# Altium PCB barricelli.PcbDoc (part 3 of 5)
Units mm, origin at the board's own origin, x right, y up, seen from the top; angles counter-clockwise.
Board outline 153 x 153 mm, 8 copper layers (Top Layer, PWR, Mid-Layer 1, Mid-Layer 2, Mid-Layer 3, Mid-Layer 4, GND, Bottom Layer); 168 components, 427 nets, 1233 pads, 911 vias.
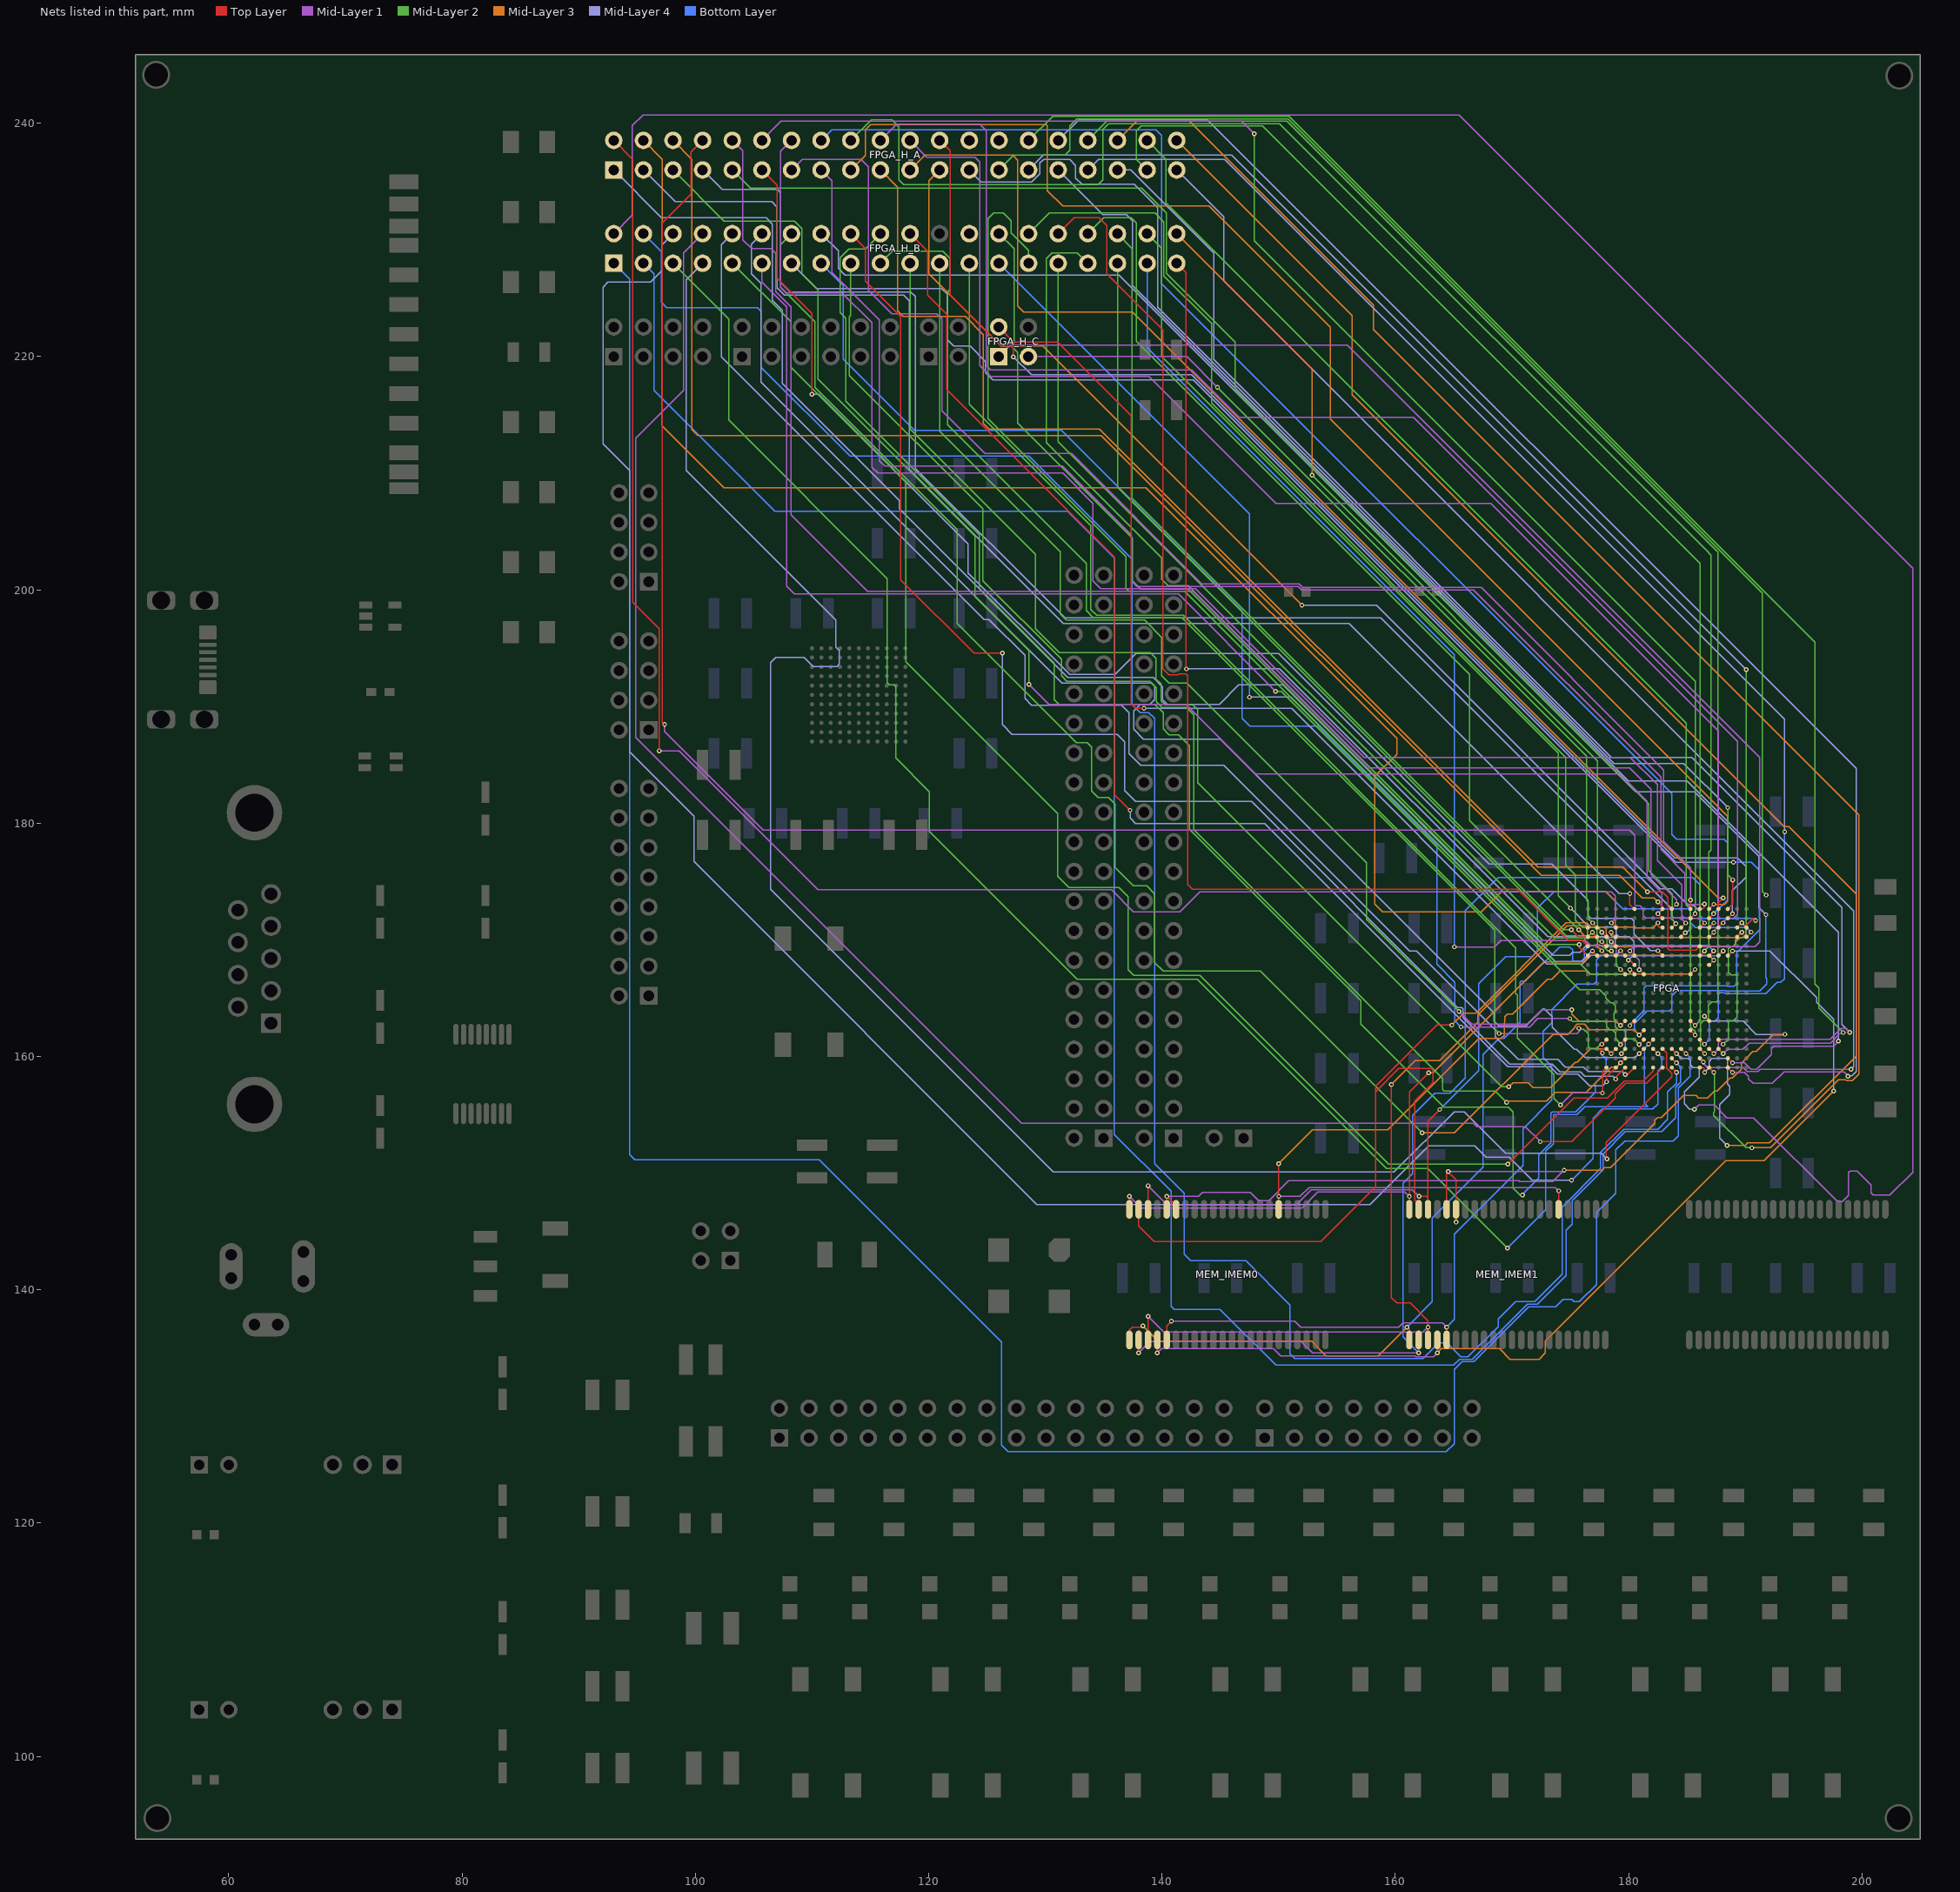
[diagram p9: the nets of this part, all layers, seen from the top]

## Via types
v1: diameter 0.4, hole 0.2, Top Layer to Bottom Layer, tented top, 896 vias
v2: diameter 0.4, hole 0.2, Top Layer to Bottom Layer, 14 vias
v3: diameter 0.6, hole 0.2, Top Layer to Bottom Layer, tented top, 1 vias

## Nets (pads, with @x,y where several pads share a name; then routed paths per layer and width w, separated by ;. In a path a pad name is that pad's centre, name@x,y a point inside that pad or via, vN(x,y) a via of type N, cw(c..) or ccw(c..) an arc to the next point about the centre after c; other vN are vias at no path point) (continued)
FPGA_HEADER0: FPGA.D4 FPGA_H_A.1 | length 126
  Top Layer w0.1: v1(178.5,170.65) 178.498,170.65 178.562,170.586 178.564,170.586 FPGA.D4@178.9,170.25
  Mid-Layer 4 w0.1: FPGA_H_A.1@93,236 97.098,231.902 106.07,231.902 106.604,231.369 106.604,224.815 107.442,223.977 107.442,217.703 117.475,207.67 117.475,206.959 131.928,192.507 139.243,192.507 140.056,191.694 140.056,190.602 140.462,190.195 144.907,190.195 146.578,191.866 150.348,191.866 173.533,168.681 174.955,168.681 175.209,168.935 175.819,168.935 176.433,169.55 176.705,169.55 176.755,169.5 177.045,169.5 177.095,169.55 177.505,169.55 177.555,169.5 177.845,169.5 177.895,169.55 178.305,169.55 178.366,169.489 178.684,169.489 178.867,169.672 178.867,170.053 178.486,170.434 178.486,170.663 178.498,170.65 v1(178.5,170.65)
FPGA_HEADER1: FPGA.C4 FPGA_H_A.2 | length 145.6
  Top Layer w0.1: FPGA_H_A.2@93,238.54 94.615,236.925 94.615,198.958 96.901,196.672 v1(96.901,186.207) ; v1(178.511,171.45) 178.714,171.247 178.9,171.247 FPGA.C4@178.9,171.05
  Mid-Layer 1 w0.1: v1(96.901,186.207) 98.603,186.207 110.515,174.295 135.661,174.295 137.541,172.415 141.529,172.415 143.233,174.119 178.509,174.119 178.867,173.761 178.867,171.806 v1(178.511,171.45)
FPGA_HEADER2: FPGA.A6 FPGA_H_A.3 | length 124.3
  Top Layer w0.1: v1(180.1,173.962) 180.1,173.05 FPGA.A6@180.5,172.65
  Mid-Layer 4 w0.1: FPGA_H_A.3@95.54,236 98.266,233.274 106.553,233.274 107.006,232.82 107.006,225.912 107.645,225.273 117.856,225.273 118.339,224.79 118.339,210.312 131.547,197.104 156.046,197.104 179.188,173.962 v1(180.1,173.962)
FPGA_HEADER3: FPGA.C9 FPGA_H_A.4 | length 142.9
  Top Layer w0.1: v1(182.499,171.45) 182.499,171.196 182.645,171.05 FPGA.C9@182.9,171.05
  Mid-Layer 3 w0.1: FPGA_H_A.4@95.54,238.54 97.155,236.925 97.155,214.046 102.438,208.763 138.633,208.763 160.122,187.274 160.122,185.903 158.242,184.023 158.242,173.076 158.902,172.415 167.361,172.415 169.113,174.168 178.042,174.168 178.861,173.348 178.861,171.298 179.064,171.094 180.518,171.094 180.594,171.018 182.067,171.018 v1(182.499,171.45)
FPGA_HEADER4: FPGA.B9 FPGA_H_A.5 | length 128.3
  Top Layer w0.1: v1(182.499,172.237) 182.513,172.237 FPGA.B9@182.9,171.85
  Mid-Layer 1 w0.1: v1(128.6,191.897) 130.302,190.195 142.062,190.195 148.031,184.226 179.211,184.226 181.585,181.852 181.585,175.294 182.855,174.024 182.855,172.593 v1(182.499,172.237)
  Mid-Layer 2 w0.1: FPGA_H_A.5@98.08,236 102.457,231.623 108.509,231.623 109.144,230.988 109.144,227.101 110.515,225.73 110.515,218.059 123.977,204.597 123.977,199.415 128.6,194.793 v1(128.6,191.897)
FPGA_HEADER5: FPGA.A9 FPGA_H_A.6 | length 125.8
  Top Layer w0.1: v1(182.499,173.253) 182.9,172.852 FPGA.A9@182.9,172.65
  Mid-Layer 3 w0.1: FPGA_H_A.6@98.08,238.54 99.695,236.925 99.695,213.766 100.228,213.233 134.798,213.233 172.517,175.514 179.222,175.514 181.153,173.584 182.169,173.584 v1(182.499,173.253)
FPGA_HEADER6: FPGA.D11 FPGA_H_A.7 | length 126.8
  Top Layer w0.1: FPGA.D11@184.5,170.25 184.811,170.561 184.912,170.561 184.873,170.6 v1(184.85,170.6)
  Mid-Layer 4 w0.1: FPGA_H_A.7@100.62,236 102.305,234.315 107.036,234.315 107.315,234.036 107.315,226.356 108.119,225.552 118.466,225.552 118.872,225.146 118.872,210.414 131.674,197.612 158.75,197.612 183.667,172.695 183.667,172.11 183.896,171.882 185.115,171.882 185.268,171.729 185.268,170.917 184.912,170.561 184.873,170.6 v1(184.85,170.6)
FPGA_HEADER7: FPGA.C11 FPGA_H_A.8 | length 151
  Top Layer w0.1: v1(97.358,188.468) 97.155,188.671 97.155,231.445 99.619,233.909 99.619,237.539 FPGA_H_A.8@100.62,238.54 ; FPGA.C11@184.5,171.05 184.875,171.425 184.912,171.425 184.9,171.437 v1(184.9,171.45)
  Mid-Layer 1 w0.1: v1(97.358,188.468) 97.358,187.858 105.791,179.426 180.086,179.426 180.543,178.968 180.543,173.005 180.645,172.903 180.965,172.903 181.25,172.618 181.25,172.095 181.458,171.887 184.449,171.887 184.9,171.437 v1(184.9,171.45)
FPGA_HEADER8: FPGA.C10 FPGA_H_A.9 | length 118.3
  Top Layer w0.1: FPGA.C10@183.7,171.05 184.024,171.374 184.024,171.449 184.05,171.423 v1(184.05,171.4)
  Mid-Layer 2 w0.1: FPGA_H_A.9@103.16,236 104.718,234.442 138.252,234.442 140.36,232.334 140.36,227.153 146.253,221.259 146.253,217.119 181.712,181.661 181.712,175.946 183.744,173.914 183.744,171.729 184.05,171.423 v1(184.05,171.4)
FPGA_HEADER9: FPGA.A10 FPGA_H_A.10 | length 130
  Top Layer w0.1: FPGA.A10@183.7,172.65 v1(184.099,173.049)
  Mid-Layer 1 w0.1: FPGA_H_A.10@103.16,238.54 104.064,237.636 104.064,230.022 104.826,229.26 106.477,229.26 106.883,228.854 106.883,225.577 108.179,224.282 108.179,206.451 114.757,199.873 142.697,199.873 157.81,184.76 180.086,184.76 181.915,182.931 181.915,175.616 184.099,173.431 v1(184.099,173.049)
FPGA_HEADER10: FPGA.F9 FPGA_H_A.11 | length 118.3
  Top Layer w0.1: FPGA_H_A.11@105.7,236 106.985,234.715 106.985,226.72 109.982,223.723 v1(109.982,216.764) ; v1(182.499,169.062) 182.499,169.051 FPGA.F9@182.9,168.65
  Mid-Layer 4 w0.1: v1(109.982,216.764) 110.566,216.764 123.368,203.962 123.368,201.452 132.08,192.74 135.97,192.74 137.77,194.54 150.011,194.54 168.046,176.505 173.411,176.505 176.505,173.411 176.505,172.11 176.759,171.856 180.238,171.856 180.467,171.628 180.467,170.485 181.889,169.062 v1(182.499,169.062)
FPGA_HEADER11: FPGA.B12 FPGA_H_A.12 | length 126.4
  Top Layer w0.1: FPGA.B12@185.3,171.85 185.687,172.237 v1(185.699,172.237)
  Mid-Layer 1 w0.1: FPGA_H_A.12@105.7,238.54 107.342,240.182 146.837,240.182 v1(147.904,239.116)
  Mid-Layer 2 w0.1: v1(147.904,239.116) 147.904,229.946 185.699,192.151 v1(185.699,172.237)
FPGA_HEADER12: FPGA.A12 FPGA_H_A.13 | length 120.5
  Top Layer w0.1: FPGA.A12@185.3,172.65 v1(185.3,173.399)
  Mid-Layer 1 w0.1: FPGA_H_A.13@108.24,236 109.146,236.906 114.198,236.906 114.833,236.271 114.833,225.676 116.837,223.672 120.701,223.672 121.133,223.241 121.133,215.367 124.816,211.684 132.232,211.684 143.391,200.525 151.734,200.525 152.059,200.2 167.363,200.2 183.007,184.556 183.007,178.457 185.3,176.164 v1(185.3,173.399)
FPGA_HEADER13: FPGA.C13 FPGA_H_A.14 | length 131.8
  Top Layer w0.1: FPGA.C13@186.1,171.05 186.5,171.45 v1(186.512,171.45)
  Mid-Layer 1 w0.1: FPGA_H_A.14@108.24,238.54 107.315,237.615 107.315,225.958 107.798,225.476 112.573,225.476 115.138,222.91 115.138,210.515 115.646,210.007 131.496,210.007 134.087,207.416 134.087,200.758 134.744,200.101 142.877,200.101 157.33,185.649 180.137,185.649 182.474,183.312 182.474,176.809 184.556,174.727 184.556,172.401 184.55,172.395 184.55,172.105 184.799,171.856 186.106,171.856 v1(186.512,171.45)
FPGA_HEADER14: FPGA.A13 FPGA_H_A.15 | length 121.6
  Top Layer w0.1: FPGA.A13@186.1,172.65 186.341,172.65 186.512,172.822 186.512,173.063 v1(186.5,173.075)
  Mid-Layer 1 w0.1: FPGA_H_A.15@110.78,236 111.684,235.096 111.684,227.228 115.773,223.139 115.773,211.074 116.23,210.617 131.445,210.617 137.389,204.673 137.389,200.762 137.846,200.304 151.672,200.304 151.976,200 166.7,200 182.753,183.947 182.753,177.775 184.836,175.692 184.836,173.304 185.115,173.025 186.512,173.025 186.5,173.037 v1(186.5,173.075)
FPGA_HEADER15: FPGA.B14 FPGA_H_A.16 | length 120
  Top Layer w0.1: FPGA.B14@186.9,171.85 v1(187.287,172.237)
  Bottom Layer w0.1: FPGA_H_A.16@110.78,238.54 111.686,239.446 139.497,239.446 139.979,238.963 139.979,226.246 183.693,182.532 183.693,179.045 184.099,178.638 188.163,178.638 188.456,178.345 188.456,173.406 v1(187.287,172.237)
FPGA_HEADER16: FPGA.A14 FPGA_H_A.17 | length 119.6
  Top Layer w0.1: FPGA.A14@186.9,172.65 v1(187.3,173.05)
  Mid-Layer 3 w0.1: FPGA_H_A.17@113.32,236 114.579,237.259 114.579,239.446 115.011,239.878 130.073,239.878 130.175,239.776 130.175,234.239 131.496,232.918 144.018,232.918 154.432,222.504 154.432,214.63 188.468,180.594 188.468,173.304 188.213,173.05 v1(187.3,173.05)
FPGA_HEADER17: FPGA.F13 FPGA_H_A.18 | length 134.2
  Top Layer w0.1: FPGA.F13@186.1,168.65 v1(186.5,169.05)
  Mid-Layer 2 w0.1: FPGA_H_A.18@113.32,238.54 115.089,240.309 116.84,240.309 117.45,239.7 117.45,235.153 117.856,234.747 134.518,234.747 134.925,235.153 134.925,239.487 135.417,239.979 150.069,239.979 186.868,203.181 ; v1(186.5,169.05) 186.868,169.418 186.868,177.498 187.075,177.705 187.075,202.975 186.85,203.2
FPGA_HEADER18: FPGA.E13 FPGA_H_A.19 | length 111.3
  Top Layer w0.1: v1(181.61,174.117) 182.88,174.117 183.363,173.634 183.363,169.24 183.49,169.113 185.763,169.113 FPGA.E13@186.1,169.45
  Mid-Layer 3 w0.1: FPGA_H_A.19@115.86,236 117.348,234.512 117.348,223.926 117.831,223.444 123.139,223.444 124.689,221.894 124.689,214.274 125.171,213.792 134.645,213.792 172.212,176.225 179.502,176.225 v1(181.61,174.117)
FPGA_HEADER19: FPGA.C15 FPGA_H_A.20 | length 124.9
  Top Layer w0.1: FPGA.C15@187.7,171.05 187.7,171.247 187.858,171.247 188.062,171.45 v1@188.075,171.45
  Mid-Layer 1 w0.1: FPGA_H_A.20@115.86,238.54 117.248,239.928 124.384,239.928 124.943,239.37 124.943,219.227 125.324,218.846 142.519,218.846 146.583,214.782 161.569,214.782 189.333,187.019 189.333,172.163 188.976,171.806 188.417,171.806 188.062,171.45 v1@188.075,171.45
  other v1: 188.1,171.45
FPGA_HEADER20: FPGA.A15 FPGA_H_A.21 | length 105
  Top Layer w0.1: FPGA.A15@187.7,172.65 187.7,173.197 v1(188.106,173.603)
  Mid-Layer 3 w0.1: FPGA_H_A.21@118.4,236 119.661,237.261 127.203,237.261 127.635,236.83 127.635,224.333 128.143,223.825 137.478,223.825 187.7,173.603 v1(188.106,173.603)
FPGA_HEADER21: FPGA.D14 FPGA_H_A.22 | length 118.6
  Top Layer w0.1: FPGA.D14@186.9,170.25 187.249,170.599 187.249,170.663 187.261,170.675 187.3,170.675 v1(187.3,170.65)
  Mid-Layer 1 w0.1: FPGA_H_A.22@118.4,238.54 119.831,237.109 123.952,237.109 124.384,236.677 124.384,219.227 125.298,218.313 138.887,218.313 149.784,207.416 168.199,207.416 187.706,187.909 187.706,171.12 187.261,170.675 187.3,170.675 v1(187.3,170.65)
FPGA_HEADER22: FPGA.C14 FPGA_H_A.23 | length 101.2
  Top Layer w0.1: FPGA.C14@186.9,171.05 186.9,171.247 187.096,171.247 v1(187.3,171.45)
  Mid-Layer 3 w0.1: FPGA_H_A.23@120.94,236 120.015,235.075 120.015,227.101 126.213,220.904 129.769,220.904 v1(151.994,198.679)
  Mid-Layer 4 w0.1: v1(151.994,198.679) 158.394,198.679 182.7,174.373 183.693,174.373 185.115,172.951 185.57,172.951 186.131,172.39 186.131,171.298 186.334,171.094 186.944,171.094 v1(187.3,171.45)
FPGA_HEADER23: FPGA.B16 FPGA_H_A.24 | length 107.6
  Top Layer w0.1: FPGA_H_A.24@120.94,238.54 121.844,237.636 121.844,225.273 126.213,220.904 127.025,220.904 127.254,220.675 v1(127.254,219.989) ; FPGA.B16@188.5,171.85 188.887,172.237 v1(188.9,172.237)
  Mid-Layer 4 w0.1: v1(127.254,219.989) 128.803,218.44 142.545,218.44 183.974,177.011 189.333,177.011 190.063,176.281 190.063,175.381 188.9,174.219 v1(188.9,172.237)
FPGA_HEADER24: FPGA.A16 FPGA_H_A.25 | length 104.5
  Top Layer w0.1: FPGA.A16@188.5,172.65 188.925,173.075 v1(188.925,175.133)
  Mid-Layer 2 w0.1: v1(188.493,181.331) 188.493,175.565 v1(188.925,175.133)
  Mid-Layer 4 w0.1: FPGA_H_A.25@123.48,236 124.505,234.975 128.829,234.975 129.54,235.687 129.54,236.601 129.845,236.906 132.08,236.906 132.588,236.398 132.588,235.306 133.121,234.772 137.617,234.772 139.624,232.766 139.624,224.235 178.743,185.115 184.709,185.115 v1(188.493,181.331)
FPGA_HEADER25: FPGA_H_A.26
FPGA_HEADER26: FPGA_H_A.27 | length 111.4
  Mid-Layer 2 w0.1: FPGA_H_A.27@126.02,236 127.29,237.27 131.674,237.27 132.085,237.682 132.085,239.776 132.695,240.386 150.8,240.386 191.465,199.72 191.465,174.168 v1(191.795,173.838)
FPGA_HEADER27: FPGA_H_A.28
FPGA_HEADER28: FPGA.R15 FPGA_H_A.29 | length 115.4
  Top Layer w0.1: FPGA.R15@187.7,161.45 188.089,161.061 188.112,161.061 v1@188.101,161.05
  Mid-Layer 2 w0.1: v1@188.101,161.05 188.539,161.488 188.539,162.935 188.671,163.068 188.988,163.068 189.281,163.361 189.281,166.974 189.255,166.999 188.773,166.999 188.544,167.228 188.544,169.215 188.754,169.425 188.945,169.425 189.154,169.634 189.154,169.977 189.382,170.205 189.967,170.205 190.068,170.307 v1(190.068,193.167)
  Mid-Layer 4 w0.1: FPGA_H_A.29@128.56,236 129.821,237.261 145.974,237.261 v1(190.068,193.167)
  other v1: 188.1,161.05
FPGA_HEADER29: FPGA.T15 FPGA_H_A.30 | length 133
  Top Layer w0.1: FPGA.T15@187.7,160.65 188.101,160.249 v1(188.112,160.249)
  Mid-Layer 1 w0.1: v1(188.112,160.249) 188.468,160.604 189.789,160.604 190.331,161.146 197.305,161.146 198.027,161.869 v1(198.399,162.052)
  Mid-Layer 2 w0.1: FPGA_H_A.30@128.56,238.54 130.634,240.614 150.876,240.614 195.961,195.529 195.961,166.224 196.3,165.885 196.3,165.07 196.297,165.067 196.297,164.155 v1(198.399,162.052)
FPGA_HEADER30: FPGA.U16 FPGA_H_A.31 | length 117.7
  Top Layer w0.1: FPGA.U16@188.5,159.85 188.889,159.461 v1(188.9,159.461)
  Mid-Layer 1 w0.1: v1(188.9,159.461) 189.941,159.461 190.489,158.914 190.983,158.914 192.227,160.158 192.227,160.68 192.43,160.884 197.561,160.884 v1(197.993,161.315)
  Mid-Layer 4 w0.1: FPGA_H_A.31@131.1,236 134.925,232.175 136.957,232.175 137.465,231.667 137.465,226.111 179.96,183.615 185.015,183.615 197.993,170.637 v1(197.993,161.315)
FPGA_HEADER31: FPGA.V16 FPGA_H_A.32 | length 130.6
  Top Layer w0.1: FPGA.V16@188.5,159.05 v1(188.902,158.648)
  Mid-Layer 1 w0.1: v1(188.902,158.648) 189.916,158.648 190.271,158.293 190.271,158.099 190.68,157.69 192.328,157.69 193.328,158.69 198.468,158.69 198.815,158.344 198.8,158.329 v1(198.8,158.3)
  Mid-Layer 4 w0.1: FPGA_H_A.32@131.1,238.54 132.869,240.309 143.891,240.309 199.505,184.696 199.505,158.712 199.136,158.344 198.815,158.344 198.8,158.329 v1(198.8,158.3)
FPGA_HEADER32: FPGA.R13 FPGA_H_A.33 | length 114.2
  Top Layer w0.1: FPGA.R13@186.1,161.45 186.489,161.061 v1@186.512,161.061
  Mid-Layer 4 w0.1: FPGA_H_A.33@133.64,236 134.546,236.906 145.364,236.906 193.37,188.9 193.37,179.255 v1(193.375,179.25)
  Bottom Layer w0.1: v1@186.512,161.061 186.893,161.442 186.893,162.887 187.007,163 187.364,163 187.7,163.336 187.7,165.342 187.808,165.45 188.195,165.45 188.245,165.4 191.765,165.4 192.71,166.345 193.04,166.345 193.37,166.675 193.37,179.349 193.375,179.345 v1(193.375,179.25)
  other v1: 186.5,161.05
FPGA_HEADER33: FPGA.T13 FPGA_H_A.34 | length 114.8
  Top Layer w0.1: FPGA.T13@186.1,160.65 186.501,160.249 v1(186.512,160.249)
  Mid-Layer 2 w0.1: FPGA_H_A.34@133.64,238.54 135.282,240.182 150.717,240.182 187.655,203.245 187.655,164.795 187.554,164.694 187.147,164.694 186.85,164.396 186.85,163.203 186.741,163.093 186.436,163.093 186.15,162.807 186.15,160.611 v1(186.512,160.249)
FPGA_HEADER34: FPGA.T14 FPGA_H_A.35 | length 118.2
  Top Layer w0.1: FPGA.T14@186.9,160.65 v1(187.301,160.249)
  Mid-Layer 1 w0.1: v1(187.301,160.249) 187.708,160.655 187.708,161.216 187.96,161.468 197.262,161.468 198.196,162.402 198.621,162.402 v1(198.954,162.069)
  Mid-Layer 4 w0.1: FPGA_H_A.35@136.18,236 137.329,236 144.424,228.905 144.424,219.761 178.537,185.649 185.408,185.649 198.298,172.759 198.298,162.725 v1(198.954,162.069)
FPGA_HEADER35: FPGA.V14 FPGA_H_A.36 | length 132.8
  Top Layer w0.1: FPGA.V14@186.9,159.05 v1(187.3,158.65)
  Mid-Layer 2 w0.1: v1(187.3,158.65) 187.35,158.6 187.35,155.255 187.3,155.205 187.3,154.965 190.094,152.171 v1(190.551,152.171)
  Mid-Layer 3 w0.1: FPGA_H_A.36@136.18,238.54 137.822,240.182 142.342,240.182 158.115,224.409 158.115,222.326 199.72,180.721 199.72,158.496 199.174,157.95 198.655,157.95 198.617,157.988 197.968,157.988 192.151,152.171 v1(190.551,152.171)
FPGA_HEADER36: FPGA.N12 FPGA_H_A.37 | length 108.1
  Top Layer w0.1: FPGA.N12@185.3,163.05 185.688,162.662 v1(185.699,162.662)
  Mid-Layer 2 w0.1: FPGA_H_A.37@138.72,236 137.795,236.925 137.795,239.37 138.201,239.776 148.615,239.776 186.131,202.26 186.131,163.093 v1(185.699,162.662)
FPGA_HEADER37: FPGA.P12 FPGA_H_A.38 | length 96.8
  Top Layer w0.1: FPGA.P12@185.3,162.25 185.3,162.052 185.496,162.052 v1(185.699,161.849)
  Mid-Layer 2 w0.1: FPGA_H_A.38@138.72,238.54 140.344,236.916 140.344,233.191 184.943,188.592 184.943,173.005 185.293,172.655 185.293,162.535 185.699,162.128 v1(185.699,161.849)
FPGA_HEADER38: FPGA.U13 FPGA_H_A.39 | length 115.2
  Top Layer w0.1: FPGA.U13@186.1,159.85 186.36,159.59 186.36,159.461 186.35,159.471 186.35,159.532 186.351,159.533 186.359,159.533 186.4,159.574 186.401,159.574 186.409,159.566 v1(186.409,159.533)
  Mid-Layer 1 w0.1: v1(186.409,159.533) 186.409,159.566 186.401,159.574 186.4,159.574 186.359,159.533 186.351,159.533 186.35,159.532 186.35,159.471 186.766,159.055 189.806,159.055 190.148,158.714 191.083,158.714 191.26,158.89 v1(199.073,158.89)
  Mid-Layer 4 w0.1: FPGA_H_A.39@141.26,236 145.288,231.972 145.288,226.492 199.305,172.475 199.305,159.122 v1(199.073,158.89)
FPGA_HEADER39: FPGA.V13 FPGA_H_A.40 | length 128.7
  Top Layer w0.1: FPGA.V13@186.1,159.05 186.365,159.05 186.512,158.902 v1(186.512,158.648)
  Mid-Layer 3 w0.1: FPGA_H_A.40@141.26,238.54 156.286,223.514 156.286,216.738 193.311,179.714 193.725,179.714 199.505,173.934 199.505,160.033 192.061,152.59 190.206,152.59 189.991,152.375 v1(188.443,152.375)
  Mid-Layer 4 w0.1: v1(186.512,158.648) 186.91,159.046 186.91,159.579 187.147,159.817 188.366,159.817 188.468,159.715 188.468,157.627 188.666,157.429 188.666,156.738 187.808,155.88 187.808,153.01 v1(188.443,152.375)
FPGA_HEADER40: FPGA.T11 FPGA_H_B.1 | length 211.7
  Top Layer w0.1: FPGA.T11@184.5,160.65 184.901,160.249 v1(184.912,160.249)
  Bottom Layer w0.1: FPGA_H_B.1@93,228 94.361,226.639 94.361,151.587 94.818,151.13 110.617,151.13 126.238,135.509 126.238,126.67 126.797,126.111 164.363,126.111 165.049,126.797 165.049,133.169 165.713,133.833 166.726,133.833 171.45,138.557 173.761,138.557 174.396,139.192 175.108,139.192 175.311,138.989 175.768,138.989 177.241,140.462 177.241,146.622 178.903,148.283 178.903,151.994 179.662,152.752 183.799,152.752 184.259,153.213 184.259,157.31 185.268,158.318 185.268,159.893 v1(184.912,160.249)
FPGA_HEADER41: FPGA.T10 FPGA_H_B.2 | length 222.4
  Top Layer w0.1: FPGA.T10@183.7,160.65 184.099,160.251 v1(184.099,160.249)
  Mid-Layer 1 w0.1: FPGA_H_B.2@93,230.54 94.591,232.131 94.591,239.802 95.504,240.716 165.481,240.716 204.343,201.854 204.343,150.063 202.387,148.107 200.965,148.107 200.762,148.311 200.762,148.996 199.568,150.19 198.984,150.19 198.857,150.063 198.857,148.082 198.323,147.549 197.891,147.549 190.703,154.737 188.443,154.737 187.35,155.829 186.004,155.829 v1(185.649,155.473)
  Mid-Layer 4 w0.1: v1(184.099,160.249) 184.531,159.817 184.722,159.817 184.73,159.825 185.107,159.825 185.318,159.614 185.318,159.258 185.522,159.055 185.928,159.055 186.055,158.928 186.055,158.242 184.765,156.952 184.765,155.956 185.248,155.473 v1(185.649,155.473)
FPGA_HEADER42: FPGA.U10 FPGA_H_B.3 | length 186.9
  Top Layer w0.1: FPGA.U10@183.7,159.85 v1(184.099,159.451)
  Bottom Layer w0.1: FPGA_H_B.3@95.54,228 96.444,227.096 96.444,217.094 106.807,206.731 131.928,206.731 135.915,202.743 135.915,153.314 140.767,148.463 140.767,138.582 141.027,138.322 143.745,138.322 143.748,138.325 144.961,138.325 149.758,133.528 164.998,133.528 165.512,134.041 166.604,134.041 171.323,138.76 172.161,138.76 174.625,141.224 174.625,145.11 175.158,145.644 175.158,147.625 177.825,150.291 177.825,151.055 177.8,151.08 177.8,151.638 179.73,153.568 182.829,153.568 184.023,154.762 184.023,157.365 184.455,157.797 184.455,159.095 v1(184.099,159.451)
FPGA_HEADER43: FPGA.V10 FPGA_H_B.4 | length 187.3
  Top Layer w0.1: FPGA.V10@183.7,159.05 v1(184.099,158.651)
  Bottom Layer w0.1: FPGA_H_B.4@95.54,230.54 97.079,229.001 97.079,224.663 97.536,224.206 105.334,224.206 105.639,223.901 105.639,219.1 113.259,211.48 128.6,211.48 137.439,202.641 137.439,190.195 138.151,189.484 138.862,189.484 139.37,188.976 139.37,150.8 141.884,148.285 141.884,143.053 142.443,142.494 147.193,142.494 150.978,138.709 150.978,134.518 151.384,134.112 162.382,134.112 163.728,135.458 164.42,135.458 165.633,134.245 166.223,134.245 168.806,136.828 168.806,137.488 170.301,138.982 171.952,138.982 174.295,141.326 174.295,147.091 177.6,150.397 177.6,151.782 179.59,153.772 182.499,153.772 183.324,154.596 183.324,156.949 184.099,157.724 v1(184.099,158.651)
FPGA_HEADER44: FPGA.R8 FPGA_H_B.5 | length 150
  Top Layer w0.1: v1(181.712,161.061) FPGA.R8@182.1,161.45
  Mid-Layer 2 w0.1: FPGA_H_B.5@98.08,228 102.845,223.235 102.845,214.554 116.434,200.965 116.434,192.049 116.637,191.846 117.043,191.846 117.17,191.719 117.17,185.598 120.066,182.702 120.066,179.299 132.74,166.624 143.027,166.624 159.258,150.393 162.789,150.393 v1(169.608,143.573)
  Bottom Layer w0.1: v1(169.608,143.573) 172.9,146.865 172.9,151.877 173.55,152.527 173.55,155.025 175.565,155.025 176.242,155.702 181.661,155.702 181.35,156.013 181.35,160.7 v1(181.712,161.061)
FPGA_HEADER45: FPGA.T8 FPGA_H_B.6 | length 169.7
  Top Layer w0.1: FPGA.T8@182.1,160.65 182.499,160.251 v1(182.499,160.249)
  Mid-Layer 4 w0.1: FPGA_H_B.6@98.08,230.54 97.155,229.615 97.155,227.406 96.139,226.39 92.507,226.39 92.075,225.958 92.075,212.522 94.361,210.236 94.361,186.131 99.873,180.619 99.873,176.708 129.261,147.32 157.836,147.32 162.839,152.324 166.827,152.324 167.792,151.359 169.774,151.359 171.729,149.403 v1(175.108,149.403)
  Bottom Layer w0.1: v1(175.108,149.403) 176.95,151.245 176.95,152.355 176.95,154.702 177.749,155.502 182.067,155.502 182.499,155.933 182.499,158.756 182.849,159.106 182.849,159.899 v1(182.499,160.249)
FPGA_HEADER46: FPGA.T9 FPGA_H_B.7 | length 164
  Top Layer w0.1: v1(178.15,151.225) 178.137,151.225 178.054,151.308 178.054,152.629 183.706,158.28 183.706,158.548 183.236,159.018 183.236,160.314 FPGA.T9@182.9,160.65
  Mid-Layer 4 w0.1: FPGA_H_B.7@100.62,228 99.212,226.592 99.212,210.236 112.039,197.409 112.039,195.123 112.344,194.818 112.344,193.65 112.141,193.446 110.084,193.446 109.322,194.208 106.883,194.208 106.451,193.777 106.451,174.32 130.683,150.089 159.893,150.089 165.049,155.245 165.913,155.245 169.443,151.714 177.648,151.714 178.137,151.225 v1(178.15,151.225)
FPGA_HEADER47: FPGA.V9 FPGA_H_B.8 | length 150.8
  Top Layer w0.1: v1(172.426,152.694) 175.123,152.694 178.873,156.444 178.873,156.814 179.751,157.692 181.542,157.692 FPGA.V9@182.9,159.05
  Mid-Layer 1 w0.1: FPGA_H_B.8@100.62,230.54 98.984,228.904 98.984,217.094 94.894,213.004 94.894,187.35 127.965,154.28 166.7,154.28 167.005,153.975 171.145,153.975 v1(172.426,152.694)
FPGA_HEADER48: FPGA.V8 FPGA_H_B.9 | length 132.6
  Top Layer w0.1: v1(169.647,150.774) 175.311,156.439 178.172,156.439 179.626,157.892 181.254,157.892 182.1,158.738 FPGA.V8@182.1,159.05
  Mid-Layer 2 w0.1: FPGA_H_B.9@103.16,228 108.179,222.981 108.179,219.1 118.034,209.245 118.034,193.853 131.064,180.823 131.064,175.463 132.029,174.498 136.322,174.498 137.109,173.711 137.109,167.437 137.592,166.954 143.231,166.954 159.41,150.774 v1(169.647,150.774)
FPGA_HEADER49: FPGA.V6 FPGA_H_B.10 | length 119.5
  Top Layer w0.1: v1(179.705,158.445) 179.895,158.445 FPGA.V6@180.5,159.05
  Mid-Layer 4 w0.1: FPGA_H_B.10@103.16,230.54 102.235,229.615 102.235,219.989 124.765,197.46 125.171,197.46 128.245,194.386 128.245,190.703 128.829,190.119 136.525,190.119 137.16,189.484 137.16,185.979 138.176,184.963 145.313,184.963 161.23,169.047 161.811,169.047 168.551,162.307 168.551,161.712 170.521,159.743 173.915,159.743 174.569,159.089 176.137,159.089 176.526,158.7 179.45,158.7 v1(179.705,158.445)
FPGA_HEADER50: FPGA.R7 FPGA_H_B.11 | length 120.1
  Top Layer w0.1: v1(180.899,161.036) 180.899,161.049 FPGA.R7@181.3,161.45
  Mid-Layer 1 w0.1: FPGA_H_B.11@105.7,228 105.7,226.405 107.823,224.282 107.823,200.33 108.509,199.644 141.402,199.644 v1(149.733,191.313)
  Mid-Layer 2 w0.1: v1(149.733,191.313) 150.212,191.313 175.79,165.735 177.508,165.735 178.049,165.194 178.049,165.001 178.45,164.6 178.645,164.6 178.867,164.378 178.867,163.795 178.749,163.677 178.749,163.221 178.867,163.103 178.867,162.56 179.121,162.306 179.603,162.306 179.756,162.154 179.756,161.646 179.908,161.493 180.442,161.493 v1(180.899,161.036)
FPGA_HEADER51: FPGA.T7 FPGA_H_B.12 | length 120.8
  Top Layer w0.1: v1(180.899,160.249) FPGA.T7@181.3,160.65
  Mid-Layer 4 w0.1: FPGA_H_B.12@105.7,230.54 104.8,229.64 104.8,227.1 105.639,226.261 105.639,217.805 131.42,192.024 139.094,192.024 139.36,191.758 139.36,190.602 138.954,190.195 138.125,190.195 137.56,189.63 137.56,188.042 138.404,187.198 145.009,187.198 168.457,163.75 168.457,163.05 168.87,162.636 171.196,162.636 172.66,164.1 172.767,164.1 173.437,163.43 173.437,162.535 175.338,160.633 175.536,160.633 176.276,159.893 180.543,159.893 v1(180.899,160.249)
FPGA_HEADER52: FPGA.N6 FPGA_H_B.13 | length 130.4
  Top Layer w0.1: v1(180.1,162.65) 180.1,162.701 180.111,162.712 180.162,162.712 FPGA.N6@180.5,163.05
  Mid-Layer 4 w0.1: FPGA_H_B.13@108.24,228 110.409,225.831 121.107,225.831 121.564,225.374 121.564,221.488 122.149,220.904 123.546,220.904 124.866,219.583 124.866,218.643 125.501,218.008 142.672,218.008 184.023,176.657 v1(188.976,176.657)
  Bottom Layer w0.1: v1(180.1,162.65) 180.1,162.701 181.331,163.932 181.331,165.887 181.493,166.05 188.443,166.05 188.479,166.014 189.052,166.014 189.255,166.218 189.255,168.91 191.225,170.88 191.225,171.795 191.211,171.809 191.211,175.971 190.525,176.657 v1(188.976,176.657)
FPGA_HEADER53: FPGA.P7 FPGA_H_B.14 | length 130.3
  Top Layer w0.1: v1(180.899,161.849) FPGA.P7@181.3,162.25
  Mid-Layer 2 w0.1: FPGA_H_B.14@108.24,230.54 107.315,229.615 107.315,225.958 110.261,223.012 110.261,217.373 122.453,205.181 122.453,197.129 132.664,186.919 133.579,186.919 133.96,186.538 133.96,182.778 134.518,182.22 135.407,182.22 135.966,181.661 135.966,176.2 137.541,174.625 138.684,174.625 139.37,173.939 139.37,168.046 140.106,167.31 148.438,167.31 v1(162.3,153.447)
  Mid-Layer 3 w0.1: v1(162.3,153.447) 165.055,153.447 173.507,161.9 174.803,161.9 175.375,162.472 175.375,162.57 175.58,162.775 176.194,162.775 176.669,162.3 180.245,162.3 180.251,162.306 180.442,162.306 v1(180.899,161.849)
FPGA_HEADER54: FPGA.R5 FPGA_H_B.15 | length 115
  Top Layer w0.1: v1(179.299,161.036) 179.578,161.315 179.7,161.315 FPGA.R5@179.7,161.45
  Mid-Layer 1 w0.1: v1(165.633,162.535) 171.501,162.535 172.212,163.246 v1(174.955,163.246)
  Mid-Layer 2 w0.1: v1(174.955,163.246) 175.184,163.017 177.978,163.017 178.105,162.89 178.105,162.56 178.41,162.255 178.613,162.255 178.889,161.979 178.889,161.525 179.299,161.116 v1(179.299,161.036)
  Bottom Layer w0.1: FPGA_H_B.15@110.78,228 112.674,226.106 112.674,219.786 118.77,213.69 131.369,213.69 146.863,198.196 146.863,188.976 147.523,188.316 153.391,188.316 163.551,178.156 163.551,167.919 165.1,166.37 165.1,163.068 v1(165.633,162.535)
FPGA_HEADER55: FPGA.T5 FPGA_H_B.16 | length 131.9
  Top Layer w0.1: v1(179.375,160.249) 179.375,160.325 FPGA.T5@179.7,160.65
  Mid-Layer 4 w0.1: FPGA_H_B.16@110.78,230.54 112.243,229.077 112.243,227.584 112.827,227 136.293,227 180.591,182.702 185.623,182.702 191.16,177.165 191.16,172.771 v1(191.77,172.161)
  Bottom Layer w0.1: v1(179.375,160.249) 179.705,160.579 179.705,162.154 179.851,162.3 180.405,162.3 180.505,162.4 180.505,162.823 181.563,163.881 183.49,163.881 183.693,164.084 183.693,165.202 184.141,165.65 188.278,165.65 188.32,165.608 191.237,165.608 191.821,166.192 191.821,166.7 191.77,166.751 v1(191.77,172.161)
FPGA_HEADER56: FPGA.U5 FPGA_H_B.17 | length 115
  Top Layer w0.1: v1(179.3,159.45) FPGA.U5@179.7,159.85
  Mid-Layer 2 w0.1: FPGA_H_B.17@113.32,228 113.32,223.505 113.208,223.393 113.208,218.389 124.638,206.959 124.638,200.787 131.369,194.056 131.369,192.634 131.826,192.176 138.938,192.176 139.522,191.592 139.522,190.398 139.983,189.938 142.088,189.938 142.723,189.303 142.723,179.451 164.05,158.124 164.05,157.175 164.177,157.048 168.554,157.048 v1(169.545,156.058)
  Mid-Layer 3 w0.1: v1(169.545,156.058) 169.678,156.19 172.98,156.19 173.72,156.931 176.362,156.931 178.531,159.1 178.95,159.1 v1(179.3,159.45)
FPGA_HEADER57: FPGA.V5 FPGA_H_B.18 | length 118.3
  Top Layer w0.1: FPGA_H_B.18@113.32,230.54 114.579,229.281 114.579,226.466 117.602,223.444 117.602,200.863 123.876,194.589 v1(126.314,194.589) ; v1(178.892,158.064) 178.892,158.242 FPGA.V5@179.7,159.05
  Mid-Layer 4 w0.1: v1(126.314,194.589) 126.314,188.468 127.152,187.63 136.144,187.63 136.794,186.98 136.794,182.789 137.719,181.864 147.676,181.864 165.334,164.205 165.684,164.205 165.806,164.084 165.806,163.328 169.791,159.343 173.451,159.343 174.107,158.686 175.874,158.686 176.26,158.3 178.656,158.3 v1(178.892,158.064)
FPGA_HEADER58: FPGA.R3 FPGA_H_B.19 | length 108.9
  Top Layer w0.1: v1(177.7,161.05) 177.636,161.05 177.622,161.036 177.686,161.036 FPGA.R3@178.1,161.45
  Mid-Layer 1 w0.1: v1(168.91,161.976) 175.565,161.976 175.92,162.331 175.827,162.425 v1(175.725,162.425)
  Mid-Layer 2 w0.1: FPGA_H_B.19@115.86,228 116.892,229.032 121.209,229.032 121.844,228.397 121.844,225.781 121.615,225.552 121.615,214.147 133.502,202.26 133.502,198.225 134.112,197.615 141.732,197.615 168.529,170.818 168.529,162.357 v1(168.91,161.976) ; v1(175.725,162.425) 175.819,162.331 176.149,162.331 176.53,161.95 176.53,160.833 176.682,160.68 177.267,160.68 177.636,161.05 v1(177.7,161.05)
FPGA_HEADER59: FPGA.T3 FPGA_H_B.20 | length 135.3
  Top Layer w0.1: v1(177.75,160.3) 177.648,160.3 177.597,160.249 177.597,160.452 177.795,160.65 FPGA.T3@178.1,160.65
  Mid-Layer 2 w0.1: FPGA_H_B.20@115.86,230.54 114.555,229.235 113.157,229.235 112.395,228.473 112.395,223.774 112.878,223.291 112.878,216.179 124.333,204.724 124.333,200.152 130.759,193.726 130.759,190.602 131.166,190.195 139.363,190.195 140.1,189.459 140.1,188.093 140.614,187.579 141.427,187.579 142.367,186.639 142.367,179.476 157.048,164.795 157.048,162.763 164.16,155.651 169.697,155.651 170.104,155.245 170.104,148.717 170.764,148.057 170.833,148.125 v1(170.9,148.125)
  Bottom Layer w0.1: v1(170.9,148.125) 170.833,148.125 172.288,149.581 172.288,151.562 173.33,152.603 173.33,155.143 173.431,155.245 175.463,155.245 177.14,156.921 177.14,157.734 178.054,158.648 178.054,159.791 177.597,160.249 177.648,160.3 v1(177.75,160.3)
FPGA_HEADER60: FPGA.T4 FPGA_H_B.21 | length 109.4
  Top Layer w0.1: v1(178.499,160.249) FPGA.T4@178.9,160.65
  Mid-Layer 2 w0.1: FPGA_H_B.21@118.4,228 118.4,213.792 129.159,203.033 129.159,196.672 131.191,194.64 138.989,194.64 139.497,194.132 139.497,192.354 139.929,191.922 139.929,190.5 140.284,190.144 142.646,190.144 143.053,189.738 143.053,183.464 169.113,157.404 v1(169.723,157.404)
  Mid-Layer 3 w0.1: v1(169.723,157.404) 170.078,157.759 171.399,157.759 171.806,157.353 173.304,157.353 175.438,159.487 175.565,159.487 176.728,160.65 178.097,160.65 v1(178.499,160.249)
FPGA_HEADER61: FPGA.V4 FPGA_H_B.22 | length 110
  Top Layer w0.1: FPGA_H_B.22@118.4,230.54 119.888,229.052 119.888,225.273 121.539,223.622 121.539,217.195 135.915,202.819 135.915,182.448 v1(137.262,181.102) ; v1(178.105,157.836) 178.105,158.255 FPGA.V4@178.9,159.05
  Mid-Layer 4 w0.1: v1(137.262,181.102) 137.262,180.442 137.719,179.984 148.819,179.984 169.66,159.143 173.243,159.143 173.9,158.486 175.657,158.486 176.657,157.486 177.755,157.486 v1(178.105,157.836)
FPGA_HEADER62: FPGA.N5 FPGA_H_B.23 | length 103.6
  Top Layer w0.1: v1(179.299,162.662) 179.312,162.662 FPGA.N5@179.7,163.05
  Mid-Layer 1 w0.1: v1(165.456,163.855) 166.548,162.763 171.323,162.763 172.58,164.02 v1(175.133,164.02)
  Mid-Layer 2 w0.1: FPGA_H_B.23@120.94,228 120.94,213.603 131.267,203.276 131.267,197.942 131.794,197.415 138.5,197.415 139.979,195.936 139.979,192.634 140.589,192.024 142.113,192.024 157.531,176.606 157.531,171.78 v1(165.456,163.855)
  Mid-Layer 3 w0.1: v1(175.133,164.02) 175.133,163.652 175.768,163.017 178.943,163.017 v1(179.299,162.662)
FPGA_HEADER64: FPGA.V3 FPGA_H_B.25 | length 103.8
  Top Layer w0.1: v1(177.755,156.87) 177.755,158.705 FPGA.V3@178.1,159.05
  Mid-Layer 1 w0.1: v1(174.168,155.854) 175.184,156.87 v1(177.755,156.87)
  Mid-Layer 2 w0.1: FPGA_H_B.25@123.48,228 123.48,215.915 133.883,205.511 133.883,198.323 134.391,197.815 141.822,197.815 170.332,169.305 170.332,165.399 170.454,165.278 170.454,161.6 173.615,158.44 173.615,156.408 v1(174.168,155.854)
FPGA_HEADER65: FPGA_H_B.26
FPGA_HEADER66: FPGA.F2 FPGA_H_B.27 | length 85.8
  Top Layer w0.1: v1(176.9,169.05) 176.895,169.05 177.111,168.834 177.116,168.834 FPGA.F2@177.3,168.65
  Mid-Layer 4 w0.1: v1(147.498,190.805) 151.054,190.805 173.711,168.148 175.968,168.148 176.882,169.062 176.895,169.05 v1(176.9,169.05)
  Bottom Layer w0.1: FPGA_H_B.27@126.02,228 147.498,206.522 v1(147.498,190.805)
FPGA_HEADER67: FPGA.F1 FPGA_H_B.28 | length 87
  Top Layer w0.1: v1(175.757,169.596) 175.757,169.393 FPGA.F1@176.5,168.65
  Mid-Layer 2 w0.1: FPGA_H_B.28@126.02,230.54 127.305,229.255 127.305,220.649 127.604,220.35 127.604,214.305 137.465,204.445 137.465,200.762 138.157,200.069 142.243,200.069 172.716,169.596 v1(175.757,169.596)
FPGA_HEADER68: FPGA.H6 FPGA_H_B.29 | length 101.2
  Top Layer w0.1: v1(180.1,167.45) 180.149,167.45 180.5,167.099 FPGA.H6@180.5,167.05
  Mid-Layer 2 w0.1: FPGA_H_B.29@128.56,228 128.56,229.097 127.051,230.607 127.051,231.648 126.39,232.308 125.578,232.308 125.095,231.826 125.095,214.681 136.906,202.87 136.906,200.127 137.163,199.869 141.938,199.869 173.883,167.925 175.875,167.925 176.725,167.075 180.004,167.075 180.162,167.234 180.162,167.437 180.149,167.45 v1(180.1,167.45)
FPGA_HEADER69: FPGA.H5 FPGA_H_B.30 | length 94.7
  Top Layer w0.1: v1(179.299,167.462) 179.299,167.451 FPGA.H5@179.7,167.05
  Mid-Layer 2 w0.1: FPGA_H_B.30@128.56,230.54 130.328,232.308 139.395,232.308 140.16,231.544 140.16,226.918 144.239,222.838 144.239,216.012 174.6,185.652 174.6,176.403 175.438,175.565 175.438,171.673 176.067,171.044 177.098,171.044 177.275,170.866 177.275,170.48 177.241,170.446 177.241,170.409 177.444,170.205 178.054,170.205 178.156,170.104 178.156,169.647 178.41,169.393 178.816,169.393 178.943,169.266 178.943,167.818 v1(179.299,167.462)
FPGA_HEADER70: FPGA.E3 FPGA_H_B.31 | length 80.3
  Top Layer w0.1: v1(177.7,169.85) FPGA.E3@178.1,169.45
  Mid-Layer 2 w0.1: FPGA_H_B.31@131.1,228 131.1,212.714 173.668,170.146 176.699,170.146 176.759,170.205 177.148,170.205 177.504,169.85 v1(177.7,169.85)
FPGA_HEADER71: FPGA.E1 FPGA_H_B.32 | length 101.8
  Top Layer w0.1: FPGA_H_B.32@131.1,230.54 132.462,231.902 134.595,231.902 135.255,231.242 135.255,227.101 140.081,222.275 140.081,193.243 140.614,192.71 141.351,192.71 141.427,192.786 142.037,192.786 142.189,192.634 142.189,174.752 142.621,174.32 170.459,174.32 174.833,169.946 176.004,169.946 FPGA.E1@176.5,169.45
FPGA_HEADER72: FPGA.F4 FPGA_H_B.33 | length 88
  Top Layer w0.1: v1(178.511,169.039) FPGA.F4@178.9,168.65
  Mid-Layer 2 w0.1: FPGA_H_B.33@133.64,228 132.735,228.905 130.581,228.905 130.073,228.397 130.073,212.649 139.954,202.768 139.954,200.914 140.513,200.355 142.24,200.355 172.649,169.946 176.23,169.946 176.677,169.5 177.767,169.5 178.228,169.039 v1(178.511,169.039)
FPGA_HEADER73: FPGA.F3 FPGA_H_B.34 | length 84.7
  Top Layer w0.1: v1(177.698,169.062) 177.902,168.859 FPGA.F3@178.1,168.65
  Mid-Layer 2 w0.1: FPGA_H_B.34@133.64,230.54 135.002,231.902 137.363,231.902 137.795,231.47 137.795,221.336 166.37,192.761 166.37,180.213 v1(175.717,170.866)
  Mid-Layer 3 w0.1: v1(175.717,170.866) 176.262,170.321 176.262,169.94 ; 176.305,169.95 176.755,169.5 177.212,169.5 177.412,169.3 177.461,169.3 v1(177.698,169.062)
FPGA_HEADER74: FPGA.D2 FPGA_H_B.35 | length 76.8
  Top Layer w0.1: v1(176.9,170.65) 176.9,170.625 176.923,170.625 176.886,170.663 176.887,170.663 FPGA.D2@177.3,170.25
  Mid-Layer 2 w0.1: FPGA_H_B.35@136.18,228 136.18,208.798 174.632,170.346 176.569,170.346 176.886,170.663 176.923,170.625 176.9,170.625 v1(176.9,170.65)
FPGA_HEADER75: FPGA.D1 FPGA_H_B.36 | length 77.8
  Top Layer w0.1: v1(175.082,170.866) 175.698,170.25 FPGA.D1@176.5,170.25
  Mid-Layer 2 w0.1: FPGA_H_B.36@136.18,230.54 137.439,229.281 137.439,207.848 174.422,170.866 v1(175.082,170.866)
FPGA_HEADER76: FPGA.H7 FPGA_H_B.37 | length 88
  Top Layer w0.1: v1(180.899,167.451) FPGA.H7@181.3,167.05
  Mid-Layer 1 w0.1: v1(165.049,169.393) 168.478,169.393 169.032,169.946 176.256,169.946 176.702,169.5 177.845,169.5 ; 177.845,169.5 178.355,169.5 178.366,169.489 178.656,169.489 178.667,169.5 178.734,169.5 178.943,169.291 178.943,168.707 178.994,168.656 180.492,168.656 180.899,168.25 v1(180.899,167.451)
  Bottom Layer w0.1: FPGA_H_B.37@138.72,228 138.72,220.751 165.049,194.422 v1(165.049,169.393)
FPGA_HEADER77: FPGA.G6 FPGA_H_B.38 | length 82.2
  Top Layer w0.1: v1(179.984,168.25) 180.1,168.25 FPGA.G6@180.5,167.85
  Mid-Layer 2 w0.1: FPGA_H_B.38@138.72,230.54 139.96,229.3 139.96,220.009 173.965,186.004 173.965,173.761 v1(175.006,172.72)
  Mid-Layer 4 w0.1: v1(175.006,172.72) 176.632,171.094 178.74,171.094 178.943,170.891 178.943,170.485 179.146,170.282 180.035,170.282 180.45,169.867 180.45,168.715 v1(179.984,168.25)
FPGA_HEADER78: FPGA.E4 FPGA_H_B.39 | length 81.9
  Top Layer w0.1: FPGA_H_B.39@141.26,228 142.037,227.223 142.037,193.243 142.055,193.225 v1(142.1,193.225) ; v1(178.511,169.839) FPGA.E4@178.9,169.45
  Mid-Layer 4 w0.1: v1(142.1,193.225) 142.055,193.225 142.037,193.243 150.075,193.243 173.062,170.256 178.094,170.256 v1(178.511,169.839)
FPGA_HEADER79: FPGA.D3 FPGA_H_B.40 | length 75.5
  Top Layer w0.1: v1(177.698,170.652) FPGA.D3@178.1,170.25
  Mid-Layer 2 w0.1: v1(152.857,209.829) 177.343,185.344 177.343,171.094 177.698,170.739 v1(177.698,170.652)
  Mid-Layer 3 w0.1: FPGA_H_B.40@141.26,230.54 152.857,218.943 v1(152.857,209.829)
FPGA_HEADER80: FPGA.F6 FPGA_H_C.1 | length 108.2
  Top Layer w0.1: v1(180.1,169.05) 180.098,169.05 180.086,169.062 180.088,169.062 FPGA.F6@180.5,168.65
  Mid-Layer 1 w0.1: FPGA_H_C.1@126,220 126.98,220.98 155.88,220.98 191.225,185.635 191.225,169.813 190.837,169.425 188.655,169.425 188.611,169.469 180.492,169.469 180.086,169.062 180.098,169.05 v1(180.1,169.05)
FPGA_HEADER81: FPGA.F5 FPGA_H_C.2 | length 91.4
  Top Layer w0.1: FPGA_H_C.2@126,222.54 127.281,221.259 131.039,221.259 137.36,214.938 137.36,190.249 137.77,189.84 v1(138.455,189.84) ; v1(179.299,169.062) 179.299,169.051 FPGA.F5@179.7,168.65
  Mid-Layer 4 w0.1: v1(138.455,189.84) 151.103,189.84 173.014,167.928 176.031,167.928 176.784,168.681 178.918,168.681 v1(179.299,169.062)
FPGA_HEADER82: FPGA.C2 FPGA_H_C.3 | length 77.1
  Top Layer w0.1: v1(176.911,171.45) 176.911,171.439 FPGA.C2@177.3,171.05
  Mid-Layer 1 w0.1: FPGA_H_C.3@128.54,220 142.128,220 v1(144.755,217.373)
  Mid-Layer 2 w0.1: v1(144.755,217.373) 176.383,185.745 176.383,173.411 176.555,173.239 176.555,173.2 176.55,173.195 176.55,171.811 v1(176.911,171.45)
FPGA_HEADER83: FPGA.C1
FPGA_INST_LBUB: FPGA.N14 MEM_IMEM0.39 MEM_IMEM0.40 MEM_IMEM1.39 MEM_IMEM1.40 | length 88.7
  Top Layer w0.1: v1@140.375,148.05 141.2,147.225 MEM_IMEM0.39@141.2,146.9 ; MEM_IMEM0.40@140.4,146.9 v1(140.4,148) ; MEM_IMEM1.40@164.4,146.9 164.4,150.225 165.2,149.425 MEM_IMEM1.39@165.2,146.9 v1(165.2,145.8) ; v1(186.5,163.45) FPGA.N14@186.9,163.05
  Mid-Layer 1 w0.1: v1(140.4,148) 143.134,148 143.484,148.35 147.573,148.35 148.267,147.656 149.167,147.656 150.862,149.35 170.571,149.35 170.655,149.266 173.466,149.266 v2@174.35,150.15 ; v1(164.525,150.15) v2@174.35,150.15 ; v2@174.387,150.187 v2@174.45,150.25 ; v2@174.425,150.15 v2@174.35,150.15
  Mid-Layer 3 w0.1: v2(174.475,150.25) 177.7,150.25 177.925,150.475 178.449,150.475 182.251,154.277 182.251,154.552 182.456,154.757 182.807,154.757 184.7,156.65 185.781,156.65 185.986,156.445 186.77,156.445 187.35,157.025 187.569,157.025 188.694,158.15 188.898,158.15 189.651,158.902 189.651,159.409 190.379,160.137 190.379,160.166 190.639,160.425 190.92,160.425 192.345,161.85 v1@193.4,161.85
  Mid-Layer 4 w0.1: v1@186.45,163.475 186.9,163.025 189.82,163.025 190.945,161.9 v1(193.396,161.9)
FPGA_INSTADDR0: FPGA.F15 MEM_IMEM0.5 MEM_IMEM1.5 | length 77.2
  Top Layer w0.1: MEM_IMEM0.5@140.4,135.7 140.4,136.906 v1(140.806,137.312) ; MEM_IMEM1.5@164.4,135.7 v1(164.4,136.8) ; FPGA.F15@187.7,168.65 187.7,168.859 187.909,168.859 v1@188.112,169.062
  Mid-Layer 1 w0.1: v1(140.806,137.312) 151.359,137.312 151.892,136.779 160.276,136.779 160.647,137.15 164.05,137.15 v1(164.4,136.8)
  Bottom Layer w0.1: v1(164.4,136.8) 165.049,137.449 165.049,144.768 170.95,150.669 170.95,153.811 173.415,156.275 173.415,159.165 172.678,159.902 172.678,162.145 173.415,162.881 173.415,164.025 175.588,166.198 177.044,166.198 177.267,166.421 177.267,168.3 177.597,168.631 187.681,168.631 v1@188.112,169.062
  other v1: 188.1,169.05
FPGA_INSTADDR1: FPGA.F16 MEM_IMEM0.4 MEM_IMEM1.4 | length 89.4
  Top Layer w0.1: v1(139.598,134.595) 139.6,134.596 MEM_IMEM0.4@139.6,135.7 ; MEM_IMEM1.4@163.6,135.7 163.6,134.596 v1(163.601,134.595) ; FPGA.F16@188.5,168.65 v1(188.9,169.05)
  Mid-Layer 1 w0.1: v1(139.598,134.595) 139.954,134.95 149.555,134.95 150.165,134.341 161.696,134.341 161.787,134.25 163.257,134.25 v1(163.601,134.595)
  Mid-Layer 3 w0.1: v1(163.601,134.595) 163.957,134.95 168.935,134.95 169.844,134.041 172.314,134.041 172.847,134.575 172.847,135.611 188.316,151.079 191.592,151.079 v1(197.561,157.048)
  Mid-Layer 4 w0.1: v1(188.9,169.05) 192.103,169.05 196.116,165.037 196.116,164.632 197.561,163.187 v1(197.561,157.048)
FPGA_INSTADDR2: FPGA.C17 MEM_IMEM0.3 MEM_IMEM1.3 | length 90.7
  Top Layer w0.1: MEM_IMEM0.3@138.8,135.7 v1(138.8,137.719) ; v1(159.664,157.607) 159.664,139.319 160.122,138.862 161.301,138.862 162.8,137.363 v1(162.8,136.8) MEM_IMEM1.3@162.8,135.7 ; FPGA.C17@189.3,171.05 v1(189.706,171.456)
  Mid-Layer 1 w0.1: v1(138.8,137.719) 140.146,136.373 162.373,136.373 v1(162.8,136.8)
  Mid-Layer 3 w0.1: v1(159.664,157.607) 161.696,159.639 163.805,159.639 167.081,162.916 167.081,163.576 174.727,171.221 176.276,171.221 176.479,171.018 176.479,170.409 176.613,170.275 177.07,170.275 177.102,170.307 177.114,170.307 177.343,170.078 177.343,169.652 177.495,169.5 177.667,169.5 177.742,169.425 188.945,169.425 189.154,169.634 189.154,169.799 189.56,170.205 189.789,170.205 190.05,170.467 190.05,171.113 v1(189.706,171.456)
FPGA_INSTADDR3: FPGA.C18 MEM_IMEM0.2 MEM_IMEM1.2 | length 99.2
  Top Layer w0.1: v1(137.998,134.595) 138,134.596 MEM_IMEM0.2@138,135.7 ; v1(162,134.6) MEM_IMEM1.2@162,135.7 ; FPGA.C18@190.1,171.05 190.1,171.298 190.659,171.856 190.856,171.856 190.875,171.837 v1(190.875,171.65)
  Mid-Layer 1 w0.1: v1(137.998,134.595) 138.963,135.56 151.948,135.56 152.908,134.6 v1(162,134.6)
  Bottom Layer w0.1: v1(162,134.6) 160.647,135.953 160.647,149.115 161.493,149.962 161.493,154.965 163.373,156.845 164.697,156.845 165.989,158.137 165.989,172.517 168.834,175.362 185.496,175.362 186.106,174.752 186.106,172.085 186.334,171.856 190.856,171.856 190.875,171.837 v1(190.875,171.65)
FPGA_INSTADDR4: FPGA.F14 MEM_IMEM0.1 MEM_IMEM1.1 | length 82.8
  Top Layer w0.1: MEM_IMEM0.1@137.2,135.7 137.2,136.55 137.454,136.804 138.43,136.804 138.35,136.884 v1(138.35,136.9) ; v1(160.997,136.8) 161.2,136.597 MEM_IMEM1.1@161.2,135.7 ; FPGA.F14@186.9,168.65 187.287,169.037 v1(187.287,169.05)
  Mid-Layer 3 w0.1: v1(138.35,136.9) 138.35,136.884 139.649,135.585 152.832,135.585 154.076,134.341 158.537,134.341 v1(160.997,136.8)
  Bottom Layer w0.1: v1(160.997,136.8) 163.17,138.973 163.17,146.152 167.513,150.495 167.513,160.186 168.881,161.554 169.324,161.554 170.688,162.918 170.688,166.37 170.79,166.472 171.145,166.472 174.066,169.393 174.955,169.393 175.207,169.14 175.207,168.257 175.293,168.171 175.971,168.171 176.225,168.425 176.225,169.088 176.662,169.525 176.73,169.525 176.755,169.5 177.045,169.5 177.07,169.525 177.53,169.525 177.555,169.5 177.845,169.5 177.87,169.525 178.33,169.525 178.366,169.489 178.656,169.489 178.692,169.525 179.13,169.525 179.155,169.5 179.445,169.5 179.47,169.525 182.33,169.525 182.355,169.5 182.645,169.5 182.67,169.525 183.93,169.525 183.955,169.5 184.245,169.5 184.27,169.525 186.812,169.525 v1(187.287,169.05)
FPGA_INSTADDR5: FPGA.G14 MEM_IMEM0.44 MEM_IMEM1.44 | length 68
  Top Layer w0.1: MEM_IMEM0.44@137.2,146.9 137.2,147.995 v1(137.211,148.006) ; MEM_IMEM1.44@161.2,146.9 v1(161.2,148) 161.2,156.958 v1(162.851,158.609) ; FPGA.G14@186.9,167.85 v1(187.3,168.25)
  Mid-Layer 1 w0.1: v1(137.211,148.006) 138.201,147.015 151.999,147.015 153.359,148.375 160.825,148.375 v1(161.2,148)
  Mid-Layer 3 w0.1: v1(162.851,158.609) 163.22,158.609 172.739,168.128 176.118,168.128 176.646,168.656 186.893,168.656 v1(187.3,168.25)
FPGA_INSTADDR6: FPGA.D17 MEM_IMEM0.43 MEM_IMEM1.43 | length 90.3
  Top Layer w0.1: MEM_IMEM0.43@138,146.9 138,145.489 139.344,144.145 153.619,144.145 158.293,148.819 158.293,156.972 ; MEM_IMEM1.43@162,146.9 162,147.65 161.671,147.65 161.671,156.185 163.22,157.734 163.22,158.826 163.068,158.979 160.299,158.979 158.293,156.972 ; v1(164.846,162.687) 163.551,162.687 158.293,157.429 158.293,156.972 ; FPGA.D17@189.3,170.25 189.611,170.561 189.611,170.612 189.649,170.65 v1(189.7,170.65)
  Mid-Layer 3 w0.1: v1(164.846,162.687) 165.882,163.723 166.923,163.723 174.65,171.45 176.403,171.45 176.759,171.094 177.851,171.094 178.054,170.891 178.054,170.485 178.333,170.205 189.205,170.205 189.649,170.65 v1(189.7,170.65)
FPGA_INSTADDR7: FPGA.D18 MEM_IMEM0.42 MEM_IMEM1.42 | length 80
  Top Layer w0.1: MEM_IMEM0.42@138.8,146.9 v1(138.8,148.92) ; v1(162.027,148.006) 162.687,148.006 162.8,147.893 ; MEM_IMEM1.42@162.8,146.9 162.8,147.893 ; v1(163.805,155.448) 162.8,154.443 162.8,147.893 ; FPGA.D18@190.1,170.25 190.5,170.65 v1(190.5,170.663)
  Mid-Layer 1 w0.1: v1(138.8,148.92) 140.458,147.262 151.477,147.262 152.79,148.575 161.457,148.575 v1(162.027,148.006)
  Bottom Layer w0.1: v1(163.805,155.448) 167.157,158.801 167.157,166.243 169.469,168.554 171.679,168.554 172.187,169.062 172.187,172.72 173.584,174.117 178.029,174.117 179.502,172.644 185.141,172.644 185.268,172.517 185.268,171.501 185.725,171.044 190.119,171.044 v1(190.5,170.663)
FPGA_INSTADDR8: FPGA.H12 MEM_IMEM0.28 MEM_IMEM1.28 | length 74.2
  Top Layer w0.1: MEM_IMEM0.28@150,146.9 v1@150,147.993 ; v1(150,150.813) v1@150,147.993 ; v1(150.012,148.006) v1@150,147.993 ; MEM_IMEM1.28@174,146.9 v1(174,148.482) ; FPGA.H12@185.3,167.05 185.496,167.259 v1(185.699,167.462)
  Mid-Layer 1 w0.1: v1(150.012,148.006) 151.82,148.006 152.59,148.775 173.707,148.775 v1(174,148.482)
  Mid-Layer 3 w0.1: v1(150,150.813) 152.908,153.721 159.366,153.721 167.192,161.546 169.062,161.546 169.331,161.815 169.331,162.906 169.398,162.973 169.398,163.416 169.603,163.621 170.046,163.621 173.049,166.624 173.4,166.624 174.121,167.345 176.368,167.345 176.639,167.075 185.312,167.075 v1(185.699,167.462)

## Text inside footprints (layer, text, board x,y; h text height)
E1: Top Overlay "+" at 80.222,170.495 h1.52; Top Overlay "-" at 80.222,172.781 h1.52
E2: Top Overlay "+" at 71.197,152.495 h1.52; Top Overlay "-" at 71.197,154.781 h1.52